# Altium PCB main.PcbDoc (part 2 of 2)
Units mm, origin at the board's own origin, x right, y up, seen from the top; angles counter-clockwise.
Board outline 75 x 37 mm, 2 copper layers (Top Layer, Bottom Layer); 95 components, 71 nets, 284 pads, 114 vias.
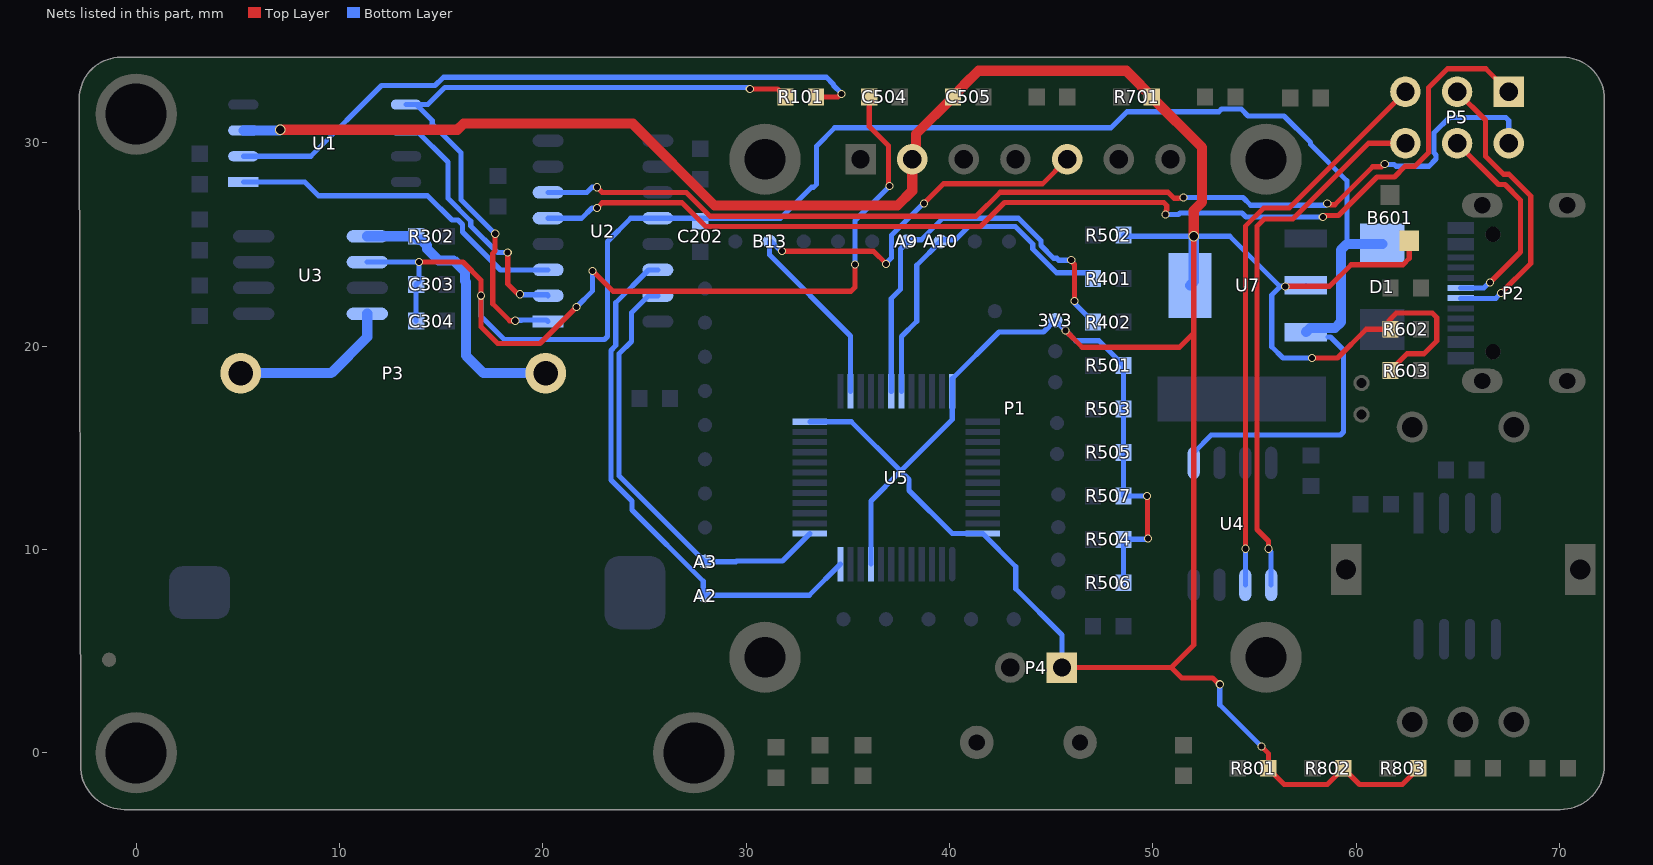
[diagram p2: the nets of this part, all layers, seen from the top]

## Via types
v1: diameter 0.4, hole 0.3, Top Layer to Bottom Layer, 109 vias
v2: diameter 0.5, hole 0.4, Top Layer to Bottom Layer, 5 vias

## Nets (pads, with @x,y where several pads share a name; then routed paths per layer and width w, separated by ;. In a path a pad name is that pad's centre, name@x,y a point inside that pad or via, vN(x,y) a via of type N, cw(c..) or ccw(c..) an arc to the next point about the centre after c; other vN are vias at no path point) (continued)
RST_SCREEN: B13.1 P1.5 U5.26 | length 27
  Top Layer w0.254: v1(31.761,24.668) 36.262,24.668 v1(36.885,24.045) ; v1(38.74,27.02) 39.706,27.986 44.581,27.986 P1.5@45.785,29.19
  Bottom Layer w0.254: v1@31.817,24.668 v1(31.761,24.668) 31.705,24.668 31.227,25.146 B13.1@31.149,25.146 31.149,24.487 35.134,20.503 U5.26@35.134,17.78 ; v1(36.885,24.045) 36.885,24.084 37.149,24.348 37.149,25.449 38.72,27.02 v1(38.74,27.02)
RXD: A10.1 R401.2 U5.31 | length 17.2
  Bottom Layer w0.254: U5.31@37.634,17.78 37.634,20.468 38.389,21.223 38.389,23.972 A10.1@39.563,25.146 39.645,25.228 40.294,25.228 40.943,25.877 43.231,25.877 44.092,25.016 44.092,24.772 45.255,23.61 46.782,23.61 47.055,23.337 R401.2@47.055,23.322
RXD2: A3.1 U2.15 U5.13 | length 21.6
  Bottom Layer w0.254: U2.15@25.659,22.479 25.202,22.479 24.362,21.639 24.362,20.23 23.753,19.621 23.753,13.621 A3.1@27.976,9.398 29.502,9.398 29.53,9.426 31.78,9.426 U5.13@33.134,10.78
SPI_CS: U1.1 U2.3 | length 17
  Bottom Layer w0.254: U1.1@5.273,28.067 8.293,28.067 8.969,27.391 14.335,27.391 15.53,26.196 15.828,26.196 16.051,25.973 16.051,25.615 17.917,23.749 U2.3@20.259,23.749
SPI_DIO: R101.2 U1.5 U2.1 | length 33.8
  Top Layer w0.254: v1(17.661,25.527) 17.649,25.515 17.649,24.671 17.538,24.56 17.538,22.084 18.377,21.245 v1(18.643,21.245) ; v1(30.179,32.641) 31.549,32.641 31.644,32.546 31.659,32.546 31.932,32.273 R101.2@31.932,32.258
  Bottom Layer w0.254: U1.5@13.273,31.877 U1.5@13.773,31.877 ; v1(17.661,25.527) 17.646,25.527 15.973,27.2 15.973,29.511 14.562,30.923 14.562,31.088 U1.5@13.773,31.877 ; v1(18.643,21.245) 18.671,21.273 18.958,21.273 18.972,21.287 20.181,21.287 U2.1@20.259,21.209 ; v1(30.179,32.641) 30.095,32.725 15.192,32.725 14.344,31.877 U1.5@13.773,31.877
SPI_DO: R101.1 U1.2 | length 32.7
  Top Layer w0.254: R101.1@33.432,32.258 34.512,32.258 34.65,32.396 v1(34.689,32.396)
  Bottom Layer w0.254: U1.2@5.273,29.337 8.591,29.337 12.063,32.809 14.701,32.809 15.114,33.222 33.945,33.222 34.302,32.865 34.302,32.823 34.689,32.436 v1(34.689,32.396)
SPI_SCK: U1.6 U2.2 | length 12.4
  Top Layer w0.254: v1(18.272,24.598) 18.272,23.058 18.752,22.578 18.857,22.578 v1(18.885,22.55)
  Bottom Layer w0.254: U1.6@13.273,30.607 13.773,30.607 15.332,29.048 15.332,27.266 16.457,26.141 16.457,25.909 17.768,24.598 v1(18.272,24.598) ; v1(18.885,22.55) 18.913,22.522 20.216,22.522 U2.2@20.259,22.479
SPK+: P3.1 U3.8 | length 8.1
  Bottom Layer w0.5: P3.1@5.139,18.669 9.591,18.669 11.369,20.447 U3.8@11.369,21.59
SPK-: P3.2 R302.1 U3.5 | length 14.1
  Bottom Layer w0.5: U3.5@11.369,25.4 13.714,25.4 13.714,25.385 13.864,25.235 14.017,25.235 14.31,24.942 14.31,24.776 14.871,24.215 15.613,24.215 16.174,23.654 16.174,23.203 16.221,23.156 16.221,19.532 17.084,18.669 P3.2@20.139,18.669
TXD: A9.1 R402.2 U5.30 | length 20.7
  Top Layer w0.254: v1(45.986,24.226) 45.986,24.186 46.153,24.019 v1(46.153,22.214)
  Bottom Layer w0.254: U5.30@37.134,17.78 37.134,22.337 37.592,22.795 37.592,24.774 37.88,25.062 A9.1@37.88,25.146 37.962,25.228 38.611,25.228 39.667,26.283 43.4,26.283 44.499,25.184 44.499,24.941 45.121,24.318 45.278,24.318 45.371,24.226 v1(45.986,24.226) ; v1(46.153,22.214) 46.181,22.187 46.181,22.073 47.055,21.199 R402.2@47.055,21.184
TXD2: A2.1 U2.14 U5.12 | length 26.5
  Bottom Layer w0.254: U2.14@25.659,23.749 25.202,23.749 23.586,22.134 23.586,20.029 23.347,19.789 23.347,13.419 24.39,12.376 24.39,11.934 27.891,8.433 27.891,7.804 A2.1@27.976,7.719 28.004,7.747 33.101,7.747 U5.12@34.634,9.28
UD+: P5.6 U4.1 | length 26.9
  Top Layer w0.254: v1(55.692,10.033) 55.692,10.414 55.12,10.986 55.12,25.892 55.475,26.247 56.877,26.247 60.601,29.972 P5.6@62.423,29.972
  Bottom Layer w0.254: v1(55.692,10.033) 55.692,9.993 55.819,9.866 U4.1@55.819,8.255
UD-: P5.5 U4.2 | length 28.3
  Top Layer w0.254: v1(54.549,10.033) 54.549,25.896 55.45,26.797 56.708,26.797 P5.5@62.423,32.512
  Bottom Layer w0.254: U4.2@54.549,8.255 v1(54.549,10.033)
USB_D+: P2.A6 P5.4 | length 10.5
  Top Layer w0.254: P5.4@64.963,29.972 66.995,27.94 67.318,27.94 68.084,27.174 68.084,24.625 v1(66.585,23.126)
  Bottom Layer w0.254: P2.A6@65.134,22.856 66.276,22.856 66.546,23.126 v1(66.585,23.126)
USB_D-: P2.A7 P5.3 | length 14.3
  Top Layer w0.254: P5.3@64.963,32.512 66.36,31.115 66.36,29.337 67.249,28.448 67.517,28.448 68.581,27.384 68.581,24.065 v1(67.122,22.606)
  Bottom Layer w0.254: P2.A7@65.134,22.348 66.864,22.348 v1(67.122,22.606)
USB_N: P5.1 U2.5 | length 54.6
  Top Layer w0.254: v1(22.672,26.797) 22.926,27.051 26.842,27.051 28.015,25.878 41.521,25.878 42.702,27.058 50.536,27.058 50.685,26.91 50.685,26.699 50.652,26.666 50.652,26.505 v1(50.624,26.477) ; v1(58.359,26.343) 58.399,26.343 58.477,26.422 59.137,26.422 61.028,28.313 61.88,28.313 62.408,28.841 62.891,28.841 63.554,29.504 63.554,32.702 64.495,33.643 66.372,33.643 P5.1@67.503,32.512
  Bottom Layer w0.254: U2.5@20.259,26.289 21.91,26.289 22.418,26.797 v1(22.672,26.797) ; v1(50.624,26.477) 51.266,26.477 51.332,26.543 54.385,26.543 54.585,26.343 v1(58.359,26.343)
USB_P: P5.2 U2.6 | length 52.7
  Top Layer w0.254: v1(22.672,27.813) 22.926,27.559 27.052,27.559 28.226,26.386 41.31,26.386 42.491,27.566 50.746,27.566 51.044,27.269 51.254,27.269 51.263,27.277 51.473,27.277 v1(51.501,27.305) ; v1(58.576,27.014) 58.604,26.986 58.707,26.986 58.739,26.953 58.95,26.953 60.818,28.821 61.232,28.821 61.367,28.956 v1(61.407,28.956)
  Bottom Layer w0.254: U2.6@20.259,27.559 22.164,27.559 22.418,27.813 v1(22.672,27.813) ; v1(51.501,27.305) 54.436,27.305 54.817,26.924 58.486,26.924 v1(58.576,27.014) ; v1(61.407,28.956) 61.435,28.928 61.867,28.928 61.955,28.841 63.578,28.841 63.931,29.194 63.931,29.404 63.832,29.504 63.832,30.492 64.582,31.242 67.354,31.242 67.503,31.093 P5.2@67.503,29.972
VDD3V3: 3V3.1 B601.2 C505.1 P1.2 P4.1 R501.2 R502.2 R503.2 R504.2 R505.2 R506.2 R507.2 R602.2 R603.2 R701.1 R801.1 R802.1 R803.1 U1.3 U5.9 U5.24 U5.36 U5.48 U7.2 | length 200.1
  Top Layer w0.254: P4.1@45.532,4.191 50.904,4.191 ; v1(45.706,20.764) 46.527,19.943 51.305,19.943 52.009,20.647 ; v1(49.716,12.635) 49.737,12.614 49.737,10.563 v1(49.758,10.542) ; v2(52.009,25.4) 52.009,20.647 ; v1(53.293,3.367) 53.253,3.367 52.935,3.685 51.41,3.685 50.904,4.191 ; v1(55.351,0.301) 55.68,-0.028 R801.1@55.68,-0.762 55.68,-0.777 56.461,-1.558 58.582,-1.558 R802.1@59.363,-0.777 ; v1(56.514,22.939) 58.692,22.939 59.756,24.003 62.296,24.003 62.611,24.318 B601.2@62.611,25.182 ; v1(57.829,19.411) 57.869,19.411 59.082,19.411 60.499,20.828 R602.2@61.685,20.828 ; 61.609,21.245 61.7,21.336 61.7,21.35 61.974,21.624 63.743,21.624 63.966,21.401 63.966,20.255 63.336,19.626 62.5,19.626 61.685,18.811 R603.2@61.685,18.796 ; R803.1@63.046,-0.762 63.046,-0.777 62.265,-1.558 60.159,-1.558 59.651,-1.05 59.636,-1.05 R802.1@59.363,-0.777 ; 50.904,4.191 52.009,5.296 52.009,20.647 ; R802.1@59.363,-0.777 R802.1@59.363,-0.762 R802.1@59.363,-0.777
  Top Layer w0.5: v2(7.086,30.639) 15.796,30.639 16.097,30.94 24.42,30.94 28.445,26.915 37.445,26.915 38.165,27.635 P1.2@38.165,29.19 38.356,29.381 38.356,30.429 40.171,32.243 C505.1@40.171,32.258 40.171,32.273 40.708,32.811 40.708,32.823 41.429,33.544 48.691,33.544 49.411,32.823 49.411,32.811 49.949,32.273 R701.1@49.949,32.258 49.949,32.243 52.425,29.767 52.425,27.086 52.009,26.67 v2(52.009,25.4)
  Bottom Layer w0.254: U5.24@33.134,16.28 35.172,16.28 37.599,13.853 ; U5.9@36.134,9.28 36.134,12.388 37.599,13.853 ; P4.1@45.532,4.191 45.532,5.794 43.262,8.064 43.262,9.152 U5.48@41.634,10.78 40.137,10.78 38.012,12.905 38.012,13.44 37.599,13.853 ; R506.2@48.555,8.36 R504.2@48.555,10.498 49.714,10.498 v1(49.758,10.542) ; R502.2@48.555,25.459 48.614,25.4 v2(52.009,25.4) 53.779,25.4 56.24,22.939 ; v1(49.716,12.635) R507.2@48.555,12.635 R505.2@48.555,14.772 R503.2@48.555,16.91 R501.2@48.555,19.047 48.555,19.062 47.358,20.259 46.211,20.259 v1(45.706,20.764) 3V3.1@45.201,21.269 44.624,20.692 42.429,20.692 40.134,18.397 U5.36@40.134,17.78 40.134,16.388 37.599,13.853 ; v1(53.293,3.367) 53.293,2.359 v1(55.351,0.301) ; U7.2@57.526,22.987 57.478,22.939 56.24,22.939 ; v1(57.829,19.411) 56.408,19.411 55.848,19.971 55.848,22.51 56.24,22.902 56.24,22.939
  Bottom Layer w0.5: U1.3@5.273,30.607 7.054,30.607 v2(7.086,30.639) ; U7.2@51.826,22.987 52.009,23.17 v2(52.009,25.4)
VDD5V: C202.2 C303.1 C304.1 C504.1 D1.2 U2.12 U3.6 U4.5 U7.3 | length 121.2
  Top Layer w0.254: v1(13.909,24.13) 16.068,24.13 16.957,23.241 v1(16.957,22.479) 16.957,20.95 17.782,20.125 19.854,20.125 v1(21.653,21.924) ; v1(22.451,23.695) 23.445,22.701 35.163,22.701 35.359,22.897 v1(35.359,24.01) ; C504.1@36.051,32.258 36.051,30.803 37.004,29.849 37.004,27.912 v1(37.052,27.865)
  Bottom Layer w0.254: U3.6@11.369,24.13 v1(13.909,24.13) 13.909,23.169 C303.1@13.77,23.03 C304.1@13.77,21.231 ; v1(16.957,22.479) 16.957,21.463 18.1,20.32 23.031,20.32 23.18,20.469 23.18,25.146 24.323,26.289 U2.12@25.659,26.289 27.74,26.289 31.689,26.289 33.213,27.813 33.318,27.813 33.467,27.962 33.467,29.845 34.356,30.734 47.945,30.734 48.732,31.521 53.24,31.521 53.372,31.653 54.35,31.653 54.682,31.32 56.448,31.32 57.748,30.021 57.748,29.927 59.541,28.133 59.541,25.019 ; v1(21.653,21.924) 22.451,22.722 v1(22.451,23.695) ; v1(35.359,24.01) 35.359,26.172 v1(37.052,27.865) ; U4.5@52.009,14.255 52.009,14.754 52.876,15.621 59.226,15.621 59.375,15.77 59.375,19.812 58.74,20.447 58.613,20.447
  Bottom Layer w0.5: U7.3@57.526,20.687 57.726,20.887 58.955,20.887 59.248,21.18 59.248,24.726 59.541,25.019 D1.2@61.28,25.019
pads on no net: P1.6 P2. P2.A5 P2.A8 P2.B5 P2.B6 P2.B7 P2.B8 U2.16 U4.4 U5.1 U5.41 U6.3 U6.7
copper on no net: | length 260.1
  Top Layer w0.025: 11.736,-1.718 14.352,-1.718 ; 11.736,-1.692 14.352,-1.692 ; 11.736,-1.667 12.854,-1.667 ; 11.736,-1.642 12.244,-1.642 ; 11.762,-1.794 14.454,-1.794 ; 11.762,-1.769 14.454,-1.769 ; 11.762,-1.743 14.454,-1.743 ; 11.787,-1.845 14.454,-1.845 ; 11.787,-1.819 14.454,-1.819 ; 11.812,-1.896 14.479,-1.896 ; 11.812,-1.87 14.479,-1.87 ; 11.838,-1.946 14.479,-1.946 ; 11.838,-1.921 14.479,-1.921 ; 11.838,-0.93 12.117,-0.93 ; 11.838,-0.905 12.092,-0.905 ; 11.838,-0.88 12.117,-0.88 ; 11.838,-0.854 12.092,-0.854 ; 11.838,-0.829 12.092,-0.829 ; 11.838,-0.803 12.092,-0.803 ; 11.838,-0.778 12.092,-0.778 ; 11.838,-0.753 12.092,-0.753 ; 11.838,-0.727 12.092,-0.727 ; 11.838,-0.702 12.092,-0.702 ; 11.838,-0.676 12.092,-0.676 ; 11.838,-0.651 12.092,-0.651 ; 11.838,-0.626 12.092,-0.626 ; 11.838,-0.6 12.092,-0.6 ; 11.838,-0.575 12.117,-0.575 ; 11.838,-0.549 12.117,-0.549 ; 11.838,-0.524 12.117,-0.524 ; 11.838,-0.499 12.117,-0.499 ; 11.863,-1.972 14.479,-1.972 ; 11.863,-1.108 12.143,-1.108 ; 11.863,-1.083 12.143,-1.083 ; 11.863,-1.057 12.143,-1.057 ; 11.863,-1.032 12.143,-1.032 ; 11.863,-1.007 12.117,-1.007 ; 11.863,-0.981 12.117,-0.981 ; 11.863,-0.956 12.117,-0.956 ; 11.863,-0.473 12.117,-0.473 ; 11.863,-0.448 12.117,-0.448 ; 11.863,-0.422 12.117,-0.422 ; 11.863,-0.397 12.117,-0.397 ; 11.863,-0.372 12.143,-0.372 ; 11.863,-0.346 12.143,-0.346 ; 11.863,-0.321 12.143,-0.321 ; 11.863,-0.295 12.143,-0.295 ; 11.863,-0.27 12.143,-0.27 ; 11.863,-0.245 12.143,-0.245 ; 11.863,-0.219 12.168,-0.219 ; 11.889,-1.997 14.505,-1.997 ; 11.889,-1.261 12.193,-1.261 ; 11.889,-1.235 12.168,-1.235 ; 11.889,-1.21 12.168,-1.21 ; 11.889,-1.184 12.168,-1.184 ; 11.889,-1.159 12.168,-1.159 ; 11.889,-1.134 12.168,-1.134 ; 11.889,-0.194 12.168,-0.194 ; 11.889,-0.168 12.168,-0.168 ; 11.889,-0.143 12.168,-0.143 ; 11.889,-0.118 12.168,-0.118 ; 11.889,-0.092 12.168,-0.092 ; 11.889,-0.067 12.168,-0.067 ; 11.889,-0.041 12.168,-0.041 ; 11.889,-0.016 12.168,-0.016 ; 11.889,0.009 12.168,0.009 ; 11.889,0.035 12.168,0.035 ; 11.889,0.06 12.168,0.06 ; 11.889,0.086 12.168,0.086 ; 11.889,0.111 12.168,0.111 ; 11.889,0.136 12.193,0.136 ; 11.889,0.162 12.193,0.162 ; 11.914,-2.023 14.505,-2.023 ; 11.914,-1.464 12.244,-1.464 ; 11.914,-1.438 12.244,-1.438 ; 11.914,-1.413 12.27,-1.413 ; 11.914,-1.388 12.219,-1.388 ; 11.914,-1.362 12.219,-1.362 ; 11.914,-1.337 12.219,-1.337 ; 11.914,-1.311 12.219,-1.311 ; 11.914,-1.286 12.193,-1.286 ; 11.914,0.187 12.193,0.187 ; 11.914,0.213 12.193,0.213 ; 11.914,0.238 12.193,0.238 ; 11.914,0.263 12.193,0.263 ; 11.914,0.289 12.193,0.289 ; 11.914,0.314 12.193,0.314 ; 11.914,0.34 12.193,0.34 ; 11.914,0.365 12.193,0.365 ; 11.939,-1.616 12.244,-1.616 ; 11.939,-1.591 12.244,-1.591 ; 11.939,-1.565 12.244,-1.565 ; 11.939,-1.54 12.244,-1.54 ; 11.939,-1.515 12.244,-1.515 ; 11.939,-1.489 12.244,-1.489 ; 11.939,0.39 12.193,0.39 ; 11.939,0.416 12.219,0.416 ; 11.939,0.441 12.219,0.441 ; 11.939,0.467 12.219,0.467 ; 11.939,0.492 12.219,0.492 ; 11.939,0.517 12.219,0.517 ; 11.939,0.543 12.219,0.543 ; 11.939,0.568 12.219,0.568 ; 11.939,0.594 12.219,0.594 ; 11.939,0.619 12.219,0.619 ; 11.965,0.644 12.219,0.644 ; 11.965,0.67 12.219,0.67 ; 11.965,0.695 12.219,0.695 ; 11.965,0.721 12.219,0.721 ; 11.965,0.746 12.219,0.746 ; 11.965,0.771 12.219,0.771 ; 11.965,0.797 12.244,0.797 ; 11.965,0.822 12.244,0.822 ; 11.99,0.848 12.219,0.848 ; 11.99,0.873 12.219,0.873 ; 11.99,0.898 12.193,0.898 ; 11.99,0.924 13.844,0.924 ; 11.99,0.949 13.794,0.949 ; 11.99,0.975 13.641,0.975 ; 12.016,-2.048 13.032,-2.048 ; 12.016,1 13.54,1 ; 12.016,1.025 13.082,1.025 ; 12.016,1.051 12.6,1.051 ; 12.016,1.076 12.397,1.076 ; 12.016,1.102 12.346,1.102 ; 12.041,1.127 12.346,1.127 ; 12.066,1.152 12.346,1.152 ; 12.066,1.178 12.371,1.178 ; 12.092,1.203 12.371,1.203 ; 12.092,1.229 12.397,1.229 ; 12.092,1.254 12.397,1.254 ; 12.092,1.279 12.422,1.279 ; 12.117,1.305 12.447,1.305 ; 12.117,1.33 12.447,1.33 ; 12.143,1.356 12.473,1.356 ; 12.143,1.381 12.473,1.381 ; 12.143,1.406 12.498,1.406 ; 12.168,1.432 12.524,1.432 ; 12.193,1.457 12.524,1.457 ; 12.193,1.483 12.549,1.483 ; 12.219,1.508 12.574,1.508 ; 12.244,-1.388 12.295,-1.388 ; 12.244,1.533 12.574,1.533 ; 12.244,1.559 12.6,1.559 ; 12.27,1.584 12.625,1.584 ; 12.295,1.61 12.625,1.61 ; 12.295,1.635 12.651,1.635 ; 12.32,1.66 12.676,1.66 ; 12.346,1.686 12.676,1.686 ; 12.371,1.711 12.701,1.711 ; 12.371,1.737 12.727,1.737 ; 12.397,-0.6 12.778,-0.6 ; 12.397,-0.575 13.032,-0.575 ; 12.397,-0.549 13.133,-0.549 ; 12.397,-0.524 13.108,-0.524 ; 12.397,-0.499 13.082,-0.499 ; 12.397,1.762 12.752,1.762 ; 12.422,-0.626 12.574,-0.626 ; 12.422,-0.473 13.082,-0.473 ; 12.422,-0.448 13.057,-0.448 ; 12.422,-0.422 13.057,-0.422 ; 12.422,-0.397 13.082,-0.397 ; 12.422,-0.372 13.082,-0.372 ; 12.422,-0.346 13.082,-0.346 ; 12.422,-0.321 13.057,-0.321 ; 12.422,-0.295 13.082,-0.295 ; 12.422,-0.27 13.082,-0.27 ; 12.422,-0.245 13.082,-0.245 ; 12.422,-0.219 13.082,-0.219 ; 12.422,-0.194 13.108,-0.194 ; 12.422,-0.168 13.108,-0.168 ; 12.422,-0.143 13.108,-0.143 ; 12.422,-0.118 13.108,-0.118 ; 12.422,-0.092 13.108,-0.092 ; 12.422,-0.067 13.108,-0.067 ; 12.422,-0.041 13.108,-0.041 ; 12.422,-0.016 13.133,-0.016 ; 12.422,0.009 13.133,0.009 ; 12.422,0.035 13.133,0.035 ; 12.422,0.06 13.133,0.06 ; 12.422,0.086 13.133,0.086 ; 12.422,0.111 13.133,0.111 ; 12.422,0.136 13.133,0.136 ; 12.422,0.162 13.133,0.162 ; 12.422,0.187 13.133,0.187 ; 12.422,0.213 13.133,0.213 ; 12.422,1.787 12.752,1.787 ; 12.422,1.813 12.778,1.813 ; 12.447,0.238 13.133,0.238 ; 12.447,0.263 13.133,0.263 ; 12.447,0.289 13.133,0.289 ; 12.447,0.314 13.133,0.314 ; 12.447,0.34 13.159,0.34 ; 12.447,0.365 13.159,0.365 ; 12.447,0.39 13.159,0.39 ; 12.447,0.416 13.159,0.416 ; 12.447,0.441 13.159,0.441 ; 12.447,0.467 13.159,0.467 ; 12.447,0.492 13.159,0.492 ; 12.447,0.619 13.209,0.619 ; 12.447,0.644 13.209,0.644 ; 12.447,0.67 13.184,0.67 ; 12.447,0.695 13.184,0.695 ; 12.447,1.838 12.803,1.838 ; 12.473,0.517 13.184,0.517 ; 12.473,0.543 13.184,0.543 ; 12.473,0.568 13.184,0.568 ; 12.473,0.594 13.209,0.594 ; 12.473,0.721 12.955,0.721 ; 12.473,1.864 12.828,1.864 ; 12.498,0.746 12.625,0.746 ; 12.498,1.889 12.854,1.889 ; 12.524,1.914 12.879,1.914 ; 12.524,1.94 12.905,1.94 ; 12.549,1.965 12.905,1.965 ; 12.574,0.898 13.921,0.898 ; 12.574,1.991 12.93,1.991 ; 12.6,2.016 12.955,2.016 ; 12.625,2.041 12.981,2.041 ; 12.625,2.067 13.006,2.067 ; 12.651,2.092 13.006,2.092 ; 12.676,2.118 13.032,2.118 ; 12.701,2.143 13.057,2.143 ; 12.701,2.168 13.057,2.168 ; 12.727,-0.676 12.778,-0.676 ; 12.727,-0.651 12.778,-0.651 ; 12.727,-0.626 12.752,-0.626 ; 12.727,2.194 13.082,2.194 ; 12.752,2.219 13.108,2.219 ; 12.778,0.746 12.955,0.746 ; 12.778,2.245 13.133,2.245 ; 12.778,2.27 13.159,2.27 ; 12.803,0.771 12.955,0.771 ; 12.803,0.797 12.955,0.797 ; 12.803,0.822 12.93,0.822 ; 12.803,2.295 13.184,2.295 ; 12.828,-0.6 12.905,-0.6 ; 12.828,0.848 12.905,0.848 ; 12.828,2.321 13.209,2.321 ; 12.854,2.346 13.209,2.346 ; 12.854,2.372 13.235,2.372 ; 12.879,-1.667 12.905,-1.667 ; 12.879,1.66 13.032,1.66 ; 12.879,2.397 13.26,2.397 ; 12.905,-0.88 13.311,-0.88 ; 12.905,-0.854 13.616,-0.854 ; 12.905,-0.829 13.616,-0.829 ; 12.905,-0.803 13.616,-0.803 ; 12.905,-0.778 13.616,-0.778 ; 12.905,-0.651 13.082,-0.651 ; 12.905,-0.626 12.93,-0.626 ; 12.905,1.533 13.057,1.533 ; 12.905,1.559 13.057,1.559 ; 12.905,1.584 13.032,1.584 ; 12.905,1.61 13.032,1.61 ; 12.905,1.635 13.032,1.635 ; 12.905,1.686 13.057,1.686 ; 12.905,1.711 13.082,1.711 ; 12.905,1.737 13.082,1.737 ; 12.905,1.762 13.082,1.762 ; 12.905,2.422 13.286,2.422 ; 12.93,-1.591 13.082,-1.591 ; 12.93,-1.565 13.082,-1.565 ; 12.93,-1.54 13.082,-1.54 ; 12.93,-1.515 13.082,-1.515 ; 12.93,-1.489 13.082,-1.489 ; 12.93,-1.464 13.082,-1.464 ; 12.93,-1.438 13.082,-1.438 ; 12.93,-1.388 13.082,-1.388 ; 12.93,-1.362 13.082,-1.362 ; 12.93,-1.337 13.082,-1.337 ; 12.93,-1.311 13.082,-1.311 ; 12.93,-1.286 13.082,-1.286 ; 12.93,-1.261 13.082,-1.261 ; 12.93,-1.159 13.082,-1.159 ; 12.93,-1.134 13.082,-1.134 ; 12.93,-1.108 13.082,-1.108 ; 12.93,-1.083 13.082,-1.083 ; 12.93,-1.057 13.082,-1.057 ; 12.93,-1.032 13.082,-1.032 ; 12.93,-1.007 13.082,-1.007 ; 12.93,-0.981 13.082,-0.981 ; 12.93,-0.905 13.108,-0.905 ; 12.93,-0.753 13.59,-0.753 ; 12.93,-0.676 13.082,-0.676 ; 12.93,1.483 13.26,1.483 ; 12.93,1.508 13.26,1.508 ; 12.93,1.787 13.108,1.787 ; 12.93,2.448 13.311,2.448 ; 12.93,2.473 13.311,2.473 ; 12.955,-1.667 13.184,-1.667 ; 12.955,-1.642 13.108,-1.642 ; 12.955,-1.616 13.108,-1.616 ; 12.955,-1.413 13.082,-1.413 ; 12.955,-1.235 13.082,-1.235 ; 12.955,-1.21 13.082,-1.21 ; 12.955,-1.184 13.082,-1.184 ; 12.955,-0.956 13.082,-0.956 ; 12.955,-0.93 13.082,-0.93 ; 12.955,-0.727 13.463,-0.727 ; 12.955,1.432 13.209,1.432 ; 12.955,1.457 13.235,1.457 ; 12.955,1.813 13.108,1.813 ; 12.955,1.838 13.108,1.838 ; 12.955,2.499 13.336,2.499 ; 12.981,-0.6 13.006,-0.6 ; 12.981,1.406 13.438,1.406 ; 12.981,1.864 13.336,1.864 ; 12.981,1.889 13.336,1.889 ; 12.981,2.524 13.362,2.524 ; 13.006,-0.626 13.032,-0.626 ; 13.006,1.356 13.413,1.356 ; 13.006,1.381 13.438,1.381 ; 13.006,1.914 13.336,1.914 ; 13.006,2.549 13.387,2.549 ; 13.032,1.94 13.311,1.94 ; 13.032,2.575 14.048,2.575 ; 13.057,-0.626 13.082,-0.626 ; 13.057,-0.575 13.159,-0.575 ; 13.057,0.721 13.159,0.721 ; 13.057,1.33 13.387,1.33 ; 13.057,1.965 13.286,1.965 ; 13.057,2.6 14.098,2.6 ; 13.082,-0.6 13.108,-0.6 ; 13.082,1.305 13.336,1.305 ; 13.082,2.626 13.717,2.626 ; 13.082,2.651 13.692,2.651 ; 13.108,0.873 14.048,0.873 ; 13.108,1.533 13.26,1.533 ; 13.108,1.559 13.286,1.559 ; 13.108,1.584 13.286,1.584 ; 13.108,2.676 13.667,2.676 ; 13.133,-0.6 13.184,-0.6 ; 13.133,1.61 13.489,1.61 ; 13.133,1.635 13.489,1.635 ; 13.133,1.991 13.235,1.991 ; 13.133,2.702 13.641,2.702 ; 13.133,2.727 13.616,2.727 ; 13.159,-0.651 13.209,-0.651 ; 13.159,-0.626 13.209,-0.626 ; 13.159,1.66 13.489,1.66 ; 13.159,1.686 13.463,1.686 ; 13.159,2.753 13.59,2.753 ; 13.184,0.06 13.26,0.06 ; 13.184,0.086 13.26,0.086 ; 13.184,1.711 13.438,1.711 ; 13.184,1.737 13.387,1.737 ; 13.184,1.838 13.336,1.838 ; 13.184,2.778 13.565,2.778 ; 13.184,2.803 13.54,2.803 ; 13.184,2.829 13.514,2.829 ; 13.209,-1.286 13.413,-1.286 ; 13.209,-1.261 13.565,-1.261 ; 13.209,-1.235 13.413,-1.235 ; 13.209,-1.21 13.413,-1.21 ; 13.209,-1.184 13.413,-1.184 ; 13.209,-0.702 13.26,-0.702 ; 13.209,-0.676 13.26,-0.676 ; 13.209,-0.321 13.997,-0.321 ; 13.209,-0.295 13.997,-0.295 ; 13.209,-0.27 13.997,-0.27 ; 13.209,-0.194 14.022,-0.194 ; 13.209,-0.168 14.022,-0.168 ; 13.209,1.762 13.336,1.762 ; 13.209,1.787 13.336,1.787 ; 13.209,1.813 13.336,1.813 ; 13.209,2.854 13.463,2.854 ; 13.235,-1.667 13.336,-1.667 ; 13.235,-1.311 13.387,-1.311 ; 13.235,-1.159 13.387,-1.159 ; 13.235,-0.549 13.997,-0.549 ; 13.235,-0.524 13.971,-0.524 ; 13.235,-0.499 13.971,-0.499 ; 13.235,-0.473 13.971,-0.473 ; 13.235,-0.448 13.997,-0.448 ; 13.235,-0.422 13.997,-0.422 ; 13.235,-0.397 13.997,-0.397 ; 13.235,-0.372 13.997,-0.372 ; 13.235,-0.346 13.997,-0.346 ; 13.235,-0.245 14.022,-0.245 ; 13.235,-0.219 14.276,-0.219 ; 13.235,-0.143 14.022,-0.143 ; 13.235,-0.118 14.022,-0.118 ; 13.235,-0.067 14.048,-0.067 ; 13.235,0.848 14.073,0.848 ; 13.235,1.432 13.463,1.432 ; 13.235,2.88 13.438,2.88 ; 13.26,-0.575 13.997,-0.575 ; 13.26,-0.092 14.048,-0.092 ; 13.26,-0.041 14.302,-0.041 ; 13.26,-0.016 14.073,-0.016 ; 13.26,0.009 14.073,0.009 ; 13.26,2.905 13.413,2.905 ; 13.286,-1.337 13.362,-1.337 ; 13.286,-1.134 13.362,-1.134 ; 13.286,-0.6 13.971,-0.6 ; 13.286,0.035 14.073,0.035 ; 13.286,0.06 14.302,0.06 ; 13.286,0.086 14.302,0.086 ; 13.286,0.111 14.302,0.111 ; 13.286,0.136 14.302,0.136 ; 13.311,-0.651 13.971,-0.651 ; 13.311,-0.626 13.971,-0.626 ; 13.311,0.162 14.302,0.162 ; 13.311,0.187 14.302,0.187 ; 13.336,-0.676 13.463,-0.676 ; 13.336,0.213 14.302,0.213 ; 13.336,1.457 13.463,1.457 ; 13.362,-0.88 13.616,-0.88 ; 13.362,-0.702 13.438,-0.702 ; 13.362,0.238 14.327,0.238 ; 13.362,0.263 14.327,0.263 ; 13.362,0.289 14.327,0.289 ; 13.362,0.314 14.352,0.314 ; 13.362,0.34 14.352,0.34 ; 13.362,0.822 14.429,0.822 ; 13.362,1.483 13.463,1.483 ; 13.362,1.508 13.489,1.508 ; 13.362,1.584 13.489,1.584 ; 13.387,-1.565 13.59,-1.565 ; 13.387,0.365 14.098,0.365 ; 13.387,0.39 14.073,0.39 ; 13.387,1.533 13.489,1.533 ; 13.387,1.559 13.489,1.559 ; 13.413,-1.54 13.59,-1.54 ; 13.413,0.416 14.073,0.416 ; 13.438,-1.616 13.59,-1.616 ; 13.438,-1.591 13.59,-1.591 ; 13.438,-1.515 13.59,-1.515 ; 13.438,-1.489 13.565,-1.489 ; 13.438,-1.464 13.565,-1.464 ; 13.438,-1.438 13.565,-1.438 ; 13.438,-1.413 13.565,-1.413 ; 13.438,-1.388 13.565,-1.388 ; 13.438,-1.362 13.565,-1.362 ; 13.438,-1.337 13.565,-1.337 ; 13.438,-1.311 13.565,-1.311 ; 13.438,-1.286 13.565,-1.286 ; 13.438,-1.235 13.565,-1.235 ; 13.438,-1.21 13.565,-1.21 ; 13.438,-1.184 13.565,-1.184 ; 13.438,-1.159 13.565,-1.159 ; 13.438,-1.134 13.565,-1.134 ; 13.438,-1.108 13.565,-1.108 ; 13.438,-1.083 13.565,-1.083 ; 13.438,-1.057 13.565,-1.057 ; 13.438,-1.032 13.565,-1.032 ; 13.438,-1.007 13.59,-1.007 ; 13.438,-0.981 13.59,-0.981 ; 13.438,-0.956 13.59,-0.956 ; 13.438,-0.93 13.59,-0.93 ; 13.438,-0.905 13.59,-0.905 ; 13.438,0.441 13.971,0.441 ; 13.438,0.467 13.921,0.467 ; 13.438,0.492 13.895,0.492 ; 13.463,-1.642 13.565,-1.642 ; 13.463,0.517 13.819,0.517 ; 13.489,0.543 13.743,0.543 ; 13.489,2.549 14.022,2.549 ; 13.514,0.797 14.429,0.797 ; 13.514,2.524 13.971,2.524 ; 13.54,-0.727 13.565,-0.727 ; 13.54,0.568 13.667,0.568 ; 13.54,2.499 13.921,2.499 ; 13.565,2.473 13.895,2.473 ; 13.59,2.448 13.87,2.448 ; 13.616,-0.676 13.946,-0.676 ; 13.616,2.422 13.895,2.422 ; 13.641,2.397 13.921,2.397 ; 13.667,2.372 13.946,2.372 ; 13.692,2.346 13.946,2.346 ; 13.717,-0.702 13.921,-0.702 ; 13.717,0.771 14.403,0.771 ; 13.717,2.321 13.971,2.321 ; 13.743,2.27 14.149,2.27 ; 13.743,2.295 13.971,2.295 ; 13.768,2.245 14.124,2.245 ; 13.794,-0.727 13.819,-0.727 ; 13.794,0.746 14.378,0.746 ; 13.794,2.219 14.098,2.219 ; 13.819,2.194 14.098,2.194 ; 13.844,2.143 14.073,2.143 ; 13.844,2.168 14.073,2.168 ; 13.87,0.721 14.378,0.721 ; 13.87,2.092 14.098,2.092 ; 13.87,2.118 14.098,2.118 ; 13.87,2.626 14.124,2.626 ; 13.895,2.041 14.124,2.041 ; 13.895,2.067 14.124,2.067 ; 13.921,1.991 14.149,1.991 ; 13.921,2.016 14.149,2.016 ; 13.921,2.651 14.175,2.651 ; 13.946,1.94 14.175,1.94 ; 13.946,1.965 14.149,1.965 ; 13.946,2.676 14.2,2.676 ; 13.971,0.695 14.378,0.695 ; 13.971,1.889 14.2,1.889 ; 13.971,1.914 14.175,1.914 ; 13.997,1.838 14.225,1.838 ; 13.997,1.864 14.2,1.864 ; 13.997,2.295 14.175,2.295 ; 13.997,2.702 14.225,2.702 ; 14.022,0.67 14.378,0.67 ; 14.022,1.787 14.225,1.787 ; 14.022,1.813 14.225,1.813 ; 14.048,-1.108 14.225,-1.108 ; 14.048,-1.083 14.225,-1.083 ; 14.048,-1.057 14.251,-1.057 ; 14.048,-1.032 14.251,-1.032 ; 14.048,-1.007 14.225,-1.007 ; 14.048,-0.981 14.225,-0.981 ; 14.048,-0.956 14.225,-0.956 ; 14.048,-0.93 14.225,-0.93 ; 14.048,-0.905 14.251,-0.905 ; 14.048,-0.88 14.251,-0.88 ; 14.048,-0.854 14.251,-0.854 ; 14.048,-0.829 14.251,-0.829 ; 14.048,-0.803 14.251,-0.803 ; 14.048,-0.778 14.251,-0.778 ; 14.048,-0.753 14.251,-0.753 ; 14.048,-0.727 14.251,-0.727 ; 14.048,-0.702 14.251,-0.702 ; 14.048,-0.676 14.251,-0.676 ; 14.048,-0.651 14.251,-0.651 ; 14.048,-0.626 14.251,-0.626 ; 14.048,-0.6 14.225,-0.6 ; 14.048,-0.575 14.251,-0.575 ; 14.048,-0.549 14.251,-0.549 ; 14.048,-0.524 14.251,-0.524 ; 14.048,-0.499 14.251,-0.499 ; 14.048,-0.473 14.251,-0.473 ; 14.048,-0.448 14.251,-0.448 ; 14.048,-0.422 14.251,-0.422 ; 14.048,-0.397 14.251,-0.397 ; 14.048,-0.372 14.251,-0.372 ; 14.048,-0.346 14.251,-0.346 ; 14.048,-0.321 14.276,-0.321 ; 14.048,-0.295 14.276,-0.295 ; 14.048,-0.194 14.276,-0.194 ; 14.048,-0.168 14.276,-0.168 ; 14.048,0.644 14.403,0.644 ; 14.048,1.686 14.276,1.686 ; 14.048,1.711 14.251,1.711 ; 14.048,1.737 14.251,1.737 ; 14.048,1.762 14.251,1.762 ; 14.048,2.321 14.2,2.321 ; 14.048,2.346 14.225,2.346 ; 14.048,2.727 14.276,2.727 ; 14.073,-1.311 14.251,-1.311 ; 14.073,-1.286 14.251,-1.286 ; 14.073,-1.261 14.251,-1.261 ; 14.073,-1.235 14.251,-1.235 ; 14.073,-1.21 14.251,-1.21 ; 14.073,-1.184 14.251,-1.184 ; 14.073,-1.159 14.251,-1.159 ; 14.073,-1.134 14.225,-1.134 ; 14.073,-0.27 14.276,-0.27 ; 14.073,-0.245 14.276,-0.245 ; 14.073,-0.143 14.276,-0.143 ; 14.073,-0.118 14.276,-0.118 ; 14.073,-0.092 14.276,-0.092 ; 14.073,-0.067 14.276,-0.067 ; 14.073,1.61 14.302,1.61 ; 14.073,1.635 14.276,1.635 ; 14.073,1.66 14.276,1.66 ; 14.073,2.372 14.225,2.372 ; 14.073,2.753 14.454,2.753 ; 14.098,-1.464 14.302,-1.464 ; 14.098,-1.438 14.302,-1.438 ; 14.098,-1.413 14.276,-1.413 ; 14.098,-1.388 14.276,-1.388 ; 14.098,-1.362 14.276,-1.362 ; 14.098,-1.337 14.276,-1.337 ; 14.098,-0.016 14.302,-0.016 ; 14.098,0.009 14.302,0.009 ; 14.098,0.035 14.302,0.035 ; 14.098,1.457 14.327,1.457 ; 14.098,1.483 14.327,1.483 ; 14.098,1.508 14.327,1.508 ; 14.098,1.533 14.302,1.533 ; 14.098,1.559 14.302,1.559 ; 14.098,1.584 14.302,1.584 ; 14.098,2.397 14.251,2.397 ; 14.124,-1.565 14.327,-1.565 ; 14.124,-1.54 14.327,-1.54 ; 14.124,-1.515 14.327,-1.515 ; 14.124,-1.489 14.327,-1.489 ; 14.124,0.365 14.352,0.365 ; 14.124,0.848 14.429,0.848 ; 14.124,1.102 14.403,1.102 ; 14.124,1.127 14.403,1.127 ; 14.124,1.152 14.403,1.152 ; 14.124,1.178 14.403,1.178 ; 14.124,1.203 14.403,1.203 ; 14.124,1.229 14.378,1.229 ; 14.124,1.33 14.352,1.33 ; 14.124,1.356 14.352,1.356 ; 14.124,1.381 14.352,1.381 ; 14.124,1.406 14.352,1.406 ; 14.124,1.432 14.327,1.432 ; 14.124,2.422 14.302,2.422 ; 14.124,2.778 14.454,2.778 ; 14.149,-1.667 14.352,-1.667 ; 14.149,-1.642 14.327,-1.642 ; 14.149,-1.616 14.327,-1.616 ; 14.149,-1.591 14.327,-1.591 ; 14.149,0.39 14.352,0.39 ; 14.149,0.416 14.352,0.416 ; 14.149,0.441 14.352,0.441 ; 14.149,0.467 14.378,0.467 ; 14.149,0.492 14.378,0.492 ; 14.149,0.517 14.378,0.517 ; 14.149,0.543 14.403,0.543 ; 14.149,0.873 14.403,0.873 ; 14.149,0.898 14.403,0.898 ; 14.149,0.924 14.429,0.924 ; 14.149,0.949 14.429,0.949 ; 14.149,0.975 14.403,0.975 ; 14.149,1 14.429,1 ; 14.149,1.025 14.429,1.025 ; 14.149,1.051 14.403,1.051 ; 14.149,1.076 14.403,1.076 ; 14.149,1.254 14.378,1.254 ; 14.149,1.279 14.352,1.279 ; 14.149,1.305 14.352,1.305 ; 14.149,2.448 14.327,2.448 ; 14.149,2.803 14.454,2.803 ; 14.175,0.568 14.403,0.568 ; 14.175,0.594 14.403,0.594 ; 14.175,0.619 14.403,0.619 ; 14.175,2.473 14.327,2.473 ; 14.175,2.829 14.454,2.829 ; 14.2,2.499 14.352,2.499 ; 14.2,2.854 14.454,2.854 ; 14.2,2.88 14.454,2.88 ; 14.225,2.524 14.378,2.524 ; 14.225,2.905 14.429,2.905 ; 14.251,2.549 14.403,2.549 ; 14.251,2.93 14.429,2.93 ; 14.276,2.575 14.429,2.575 ; 14.302,2.6 14.429,2.6 ; 14.302,2.626 14.454,2.626 ; 14.302,2.727 14.454,2.727 ; 14.327,2.651 14.454,2.651 ; 14.327,2.676 14.454,2.676 ; 14.327,2.702 14.454,2.702 ; 14.327,2.956 14.403,2.956 ; 14.479,2.829 14.784,2.829 ; 14.479,2.854 14.784,2.854 ; 14.479,2.88 14.657,2.88 ; 14.479,2.905 14.657,2.905 ; 14.505,2.778 14.733,2.778 ; 14.505,2.803 14.759,2.803 ; 14.505,2.93 14.657,2.93 ; 14.505,2.956 14.657,2.956 ; 14.53,2.753 14.708,2.753 ; 14.53,2.981 14.81,2.981 ; 14.556,3.007 14.81,3.007 ; 14.581,3.032 14.784,3.032 ; 14.606,3.057 14.759,3.057 ; 14.683,2.88 14.784,2.88 ; 14.683,2.956 14.81,2.956 ; 14.708,2.905 14.81,2.905 ; 14.708,2.93 14.81,2.93 ; 14.835,3.007 15.114,3.007 ; 14.835,3.032 15.114,3.032 ; 14.86,2.956 15.089,2.956 ; 14.86,2.981 15.114,2.981 ; 14.86,3.057 15.14,3.057 ; 14.86,3.083 15.14,3.083 ; 14.86,3.108 14.987,3.108 ; 14.886,2.93 15.064,2.93 ; 14.886,3.134 14.987,3.134 ; 14.886,3.159 15.165,3.159 ; 14.911,3.184 15.165,3.184 ; 14.911,3.21 15.165,3.21 ; 14.937,3.235 15.14,3.235 ; 14.962,2.905 15.013,2.905 ; 15.013,3.261 15.089,3.261 ; 15.064,3.108 15.165,3.108 ; 15.064,3.134 15.165,3.134

## Polygon pours and split planes (outlines as drawn)
GND on Bottom Layer "GND_L02_P001" (solid, pour order 1): -2.659,34.257 71.705,34.257 72.31,33.653 72.025,33.368 72.025,-2.814 -2.664,-2.814 -2.67,-2.82
GND on Top Layer "GND_L01_P000" (solid, pour order 0): -2.863,34.362 -2.702,34.201 72.072,34.201 72.072,-2.619 71.901,-2.79 -2.838,-2.79

## Keep-outs
Keep-Out Layer:
  lines w0.254: -0.8,34.201 70.17,34.201 cw(c70.17,32.169) 72.202,32.169 ; -0.762,34.201 ccw(c-0.762,32.169) -2.794,32.169 -2.734,-0.635 ccw(c-0.575,-0.635) -0.575,-2.794 ; -0.569,-2.796 70.043,-2.796 ; 70.043,-2.794 ccw(c70.043,-0.635) 72.202,-0.635 72.202,4.699 72.202,27.559 72.202,32.258

## Other copper
Bottom Layer:
  rectangle net GND: 64.582,25.654 65.725,25.979
  rectangle net GND: 64.582,19.233 65.657,19.558

## Silkscreen, mask and mechanical layers (free items; w line width, h text height)
Top Overlay:
  lines w0.254: 61.28,31.242 68.646,31.242 ; 62.169,28.956 65.217,28.956 ; 64.836,31.496 67.884,31.496
  text "VOICE" at 69.456,32.627 h1 r270
  text "DWNLD" at 59.964,32.473 h1 r270
Top Paste:
  drawing of 681 lines, arcs and shapes, not listed
Top Solder:
  drawing of 681 lines, arcs and shapes, not listed

## Dimensions
-0.8,34.201 to -0.569,-2.796 on Top Overlay
-2.794,32.169 to 72.202,4.699 on Top Overlay